# Altium PCB 数粒机发射板4通道.PcbDoc
Units mm, origin at the board's own origin, x right, y up, seen from the top; angles counter-clockwise.
Board outline 124 x 52 mm, 4 copper layers (TopLayer, MidLayer1, MidLayer2, BottomLayer); 17 components, 66 nets, 56 pads, 0 vias.
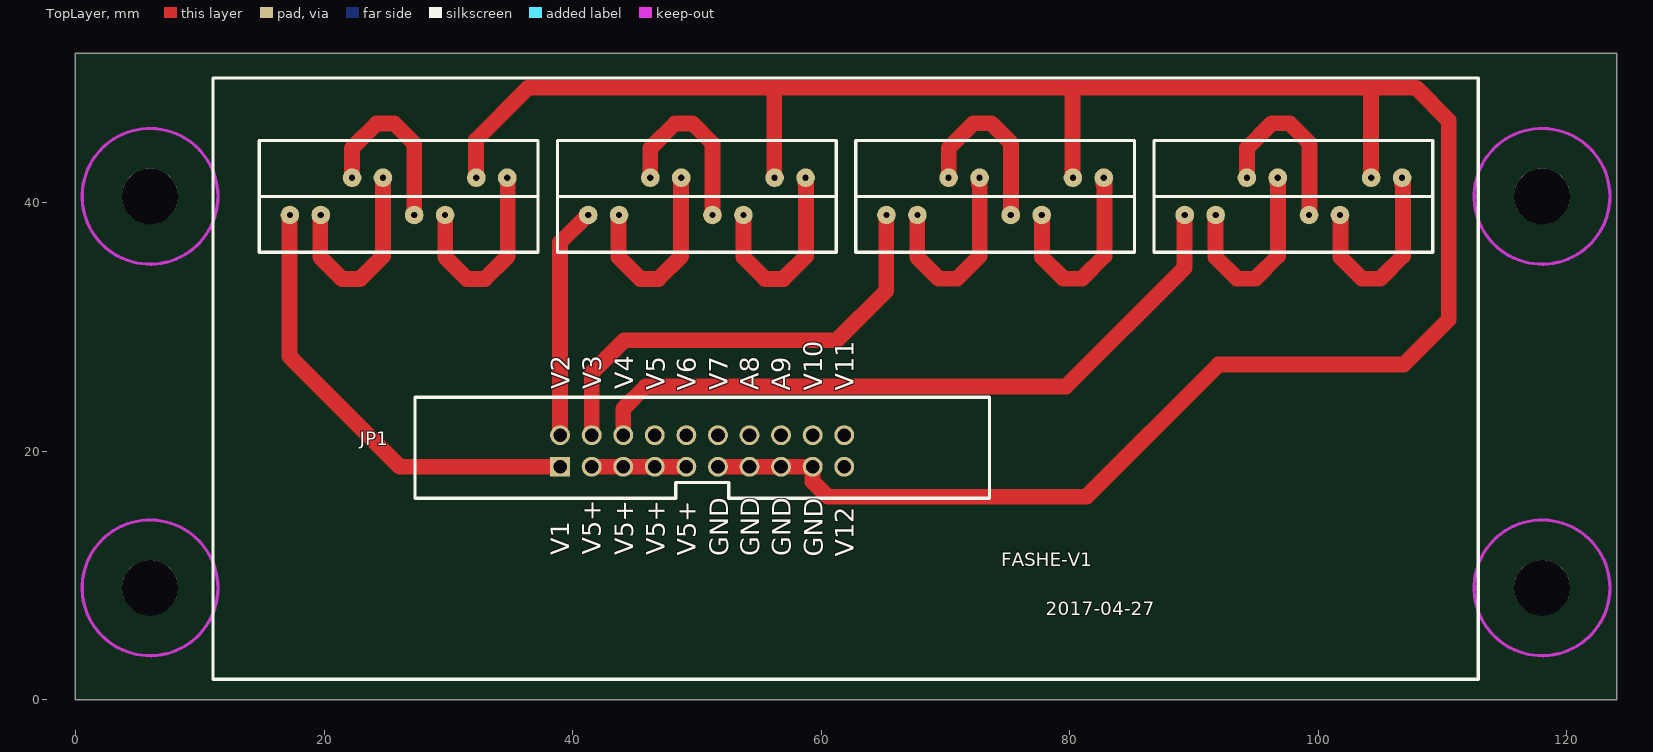
[diagram p0: TopLayer view]
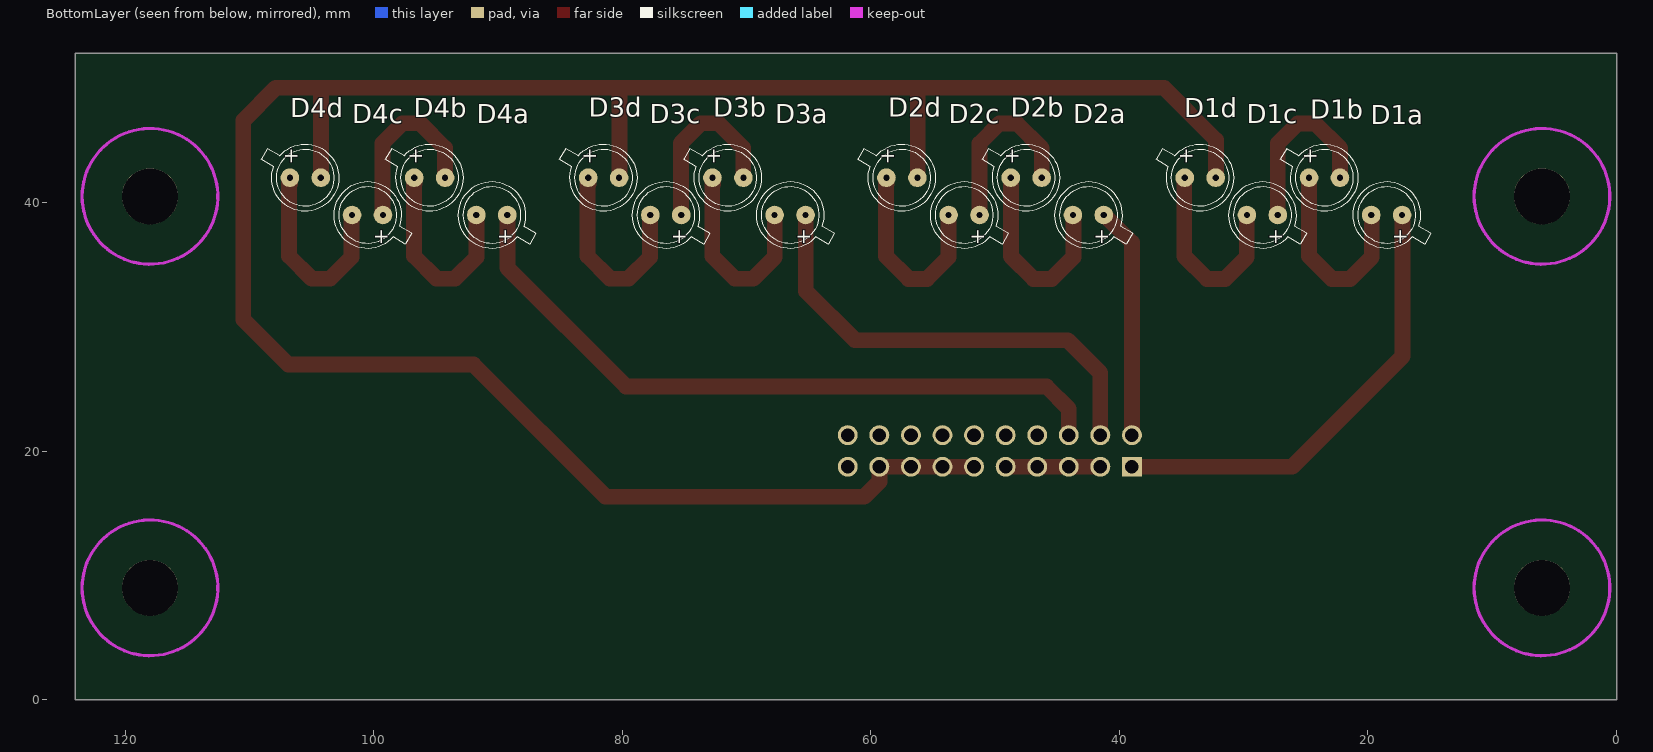
[diagram p1: BottomLayer view, seen from below]

## Layer stack, top to bottom
TopLayer: signal copper 0.0356
Dielectric: core 0.32, FR-4, Dk 4.8
MidLayer1: signal copper 0.0356
Dielectric: dielectric 0.32, FR-4, Dk 4.8
MidLayer2: signal copper 0.0356
Dielectric: dielectric 0.32, FR-4, Dk 4.8
BottomLayer: signal copper 0.0356

## Board outline
0,0 0,52 124,52 124,0

## Design rules (kind name [scope] priority, off if disabled: settings)
Clearance [All] p1: gap=0.762
PolygonConnect [All] p1: connectstyle=Relief reliefconductorwidth=0.254 reliefentries=4 polygonreliefangle="90 Angle"
RoutingLayers [All] p1: top layer_v5=TRUE mid layer 1_v5=FALSE mid layer 2_v5=FALSE bottom layer_v5=TRUE
RoutingVias RoutingVias_1 [All] p1: holewidth=1 width=2 viastyle="Through Hole" minholewidth=0.711 minwidth=1.27 maxholewidth=1 maxwidth=2
SilkscreenOverComponentPads [All] p1: minsilkscreentomaskgap=0.254
SolderMaskExpansion [All] p1: expansion=0.102
TestPointUsage [All] p1: valid=0 allowmultiple=FALSE
Testpoint [All] p1: side=15 testpointundercomponent=TRUE minsize=1.016 maxsize=2.54 preferedsize=1.524 minholesize=0.508 maxholesize=1.016 preferedholesize=0.813 testpointgrid=0.025 style=1023 order=0123456789
Width [All] p1: maxlimit=4.54 minlimit=0.2 preferedwidth=1
22 further rules are at their usual default settings.

## Components (designator, comment, footprint, x,y, rotation, side; value= is the part's Value field where it differs from the comment)
D1a "红外发射珠子" SEND-LED 18.5,39 r270 bottom
D1b "红外发射珠子" SEND-LED 23.5,42 r90 bottom
D1c "红外发射珠子" SEND-LED 28.5,39 r270 bottom
D1d "红外发射珠子" SEND-LED 33.5,42 r90 bottom
D2a "红外发射珠子" SEND-LED 42.5,39 r270 bottom
D2b "红外发射珠子" SEND-LED 47.5,42 r90 bottom
D2c "红外发射珠子" SEND-LED 52.5,39 r270 bottom
D2d "红外发射珠子" SEND-LED 57.5,42 r90 bottom
D3a "红外发射珠子" SEND-LED 66.5,39 r270 bottom
D3b "红外发射珠子" SEND-LED 71.5,42 r90 bottom
D3c "红外发射珠子" SEND-LED 76.5,39 r270 bottom
D3d "红外发射珠子" SEND-LED 81.5,42 r90 bottom
D4a "红外发射珠子" SEND-LED 90.5,39 r270 bottom
D4b "红外发射珠子" SEND-LED 95.5,42 r90 bottom
D4c "红外发射珠子" SEND-LED 100.5,39 r270 bottom
D4d "红外发射珠子" SEND-LED 105.5,42 r90 bottom
JP1 "牛角插座" IDCL20 38.996,18.748 r0 top locked

## Footprints (in the part's own frame and the unit in brackets; to place one, negate y for a bottom-side part, rotate by r counter-clockwise, add the part's x,y. Pads: shape width x height; smd on the part's side, far side on the other; paste and mask are expansions set on the pad)
IDCL20 [mm]
  rect 1.6x1.6 hole 1.1: 1(0,0)
  round 1.6 hole 1.1: 2(0,2.54) 3(2.54,0) 4(2.54,2.54) 5(5.08,0) 6(5.08,2.54) 7(7.62,0) 8(7.62,2.54) 9(10.16,0) 10(10.16,2.54) 11(12.7,0) 12(12.7,2.54) 13(15.24,0) 14(15.24,2.54) 15(17.78,0) 16(17.78,2.54) 17(20.32,0) 18(20.32,2.54) 19(22.86,0) 20(22.86,2.54)
  silkscreen extent -11.68,-2.54 34.54,5.59
SEND-LED [mm]
  round 1.5 hole 0.5: 1(0,1.245) 2(0,-1.245)
  silkscreen extent -2.7,-2.69 2.7,3.55

## Free pads (board coordinates)
  round 4.5 hole 4.5 unplated: 1(6,40.5) 2(6,9) 5(118,40.5) 6(118,9)

## Nets (pads, with @x,y where several pads share a name; then routed paths per layer and width w, separated by ;. In a path a pad name is that pad's centre, name@x,y a point inside that pad or via, vN(x,y) a via of type N, cw(c..) or ccw(c..) an arc to the next point about the centre after c; other vN are vias at no path point)
A-PA4'_0: 
A-PA4_0: 
A-PA5_0: 
A-PA6_0: 
A-VOUT1_0: D1a.1 JP1.1 | length 36.8
  TopLayer w1.27: D1a.1 17.215,38.96 17.215,27.63 26.097,18.748 JP1.1
A-VOUT2_0: D2a.1 JP1.2 | length 18.6
  TopLayer w1.27: JP1.2 38.996,36.781 D2a.1@41.215,39
A-VOUT3_0: D3a.1 JP1.4 | length 37.6
  TopLayer w1.27: JP1.4 41.536,26.296 44.16,28.92 61.265,28.92 65.235,32.89 D3a.1@65.235,39.01
A-VOUT4_0: D4a.1 JP1.6 | length 56.2
  TopLayer w1.27: JP1.6 44.076,23.406 45.875,25.205 79.69,25.205 89.245,34.76 D4a.1@89.245,39.01
A-VOUT5_0: JP1.8
A-VOUT6_0: JP1.10
A-VOUT7_0: JP1.12
A-VOUT8_0: JP1.14
A-VOUT9_0: JP1.16
A-VOUT10_0: JP1.18
A-VOUT11_0: JP1.20
A-VOUT12_0: JP1.19
GND: D1d.2 D2d.2 D3d.2 D4d.2 JP1.11 JP1.13 JP1.15 JP1.17 | length 188
  TopLayer w1.27: D1d.2@32.225,42 32.225,45.04 36.415,49.23 107.87,49.23 110.505,46.595 110.505,30.595 106.88,26.97 91.98,26.97 81.342,16.332 60.533,16.332 59.316,17.549 JP1.17 JP1.15 JP1.13 JP1.11 ; D2d.2@56.225,42 56.225,49.185 ; D3d.2@80.235,42 80.235,49.025 ; D4d.2@104.235,42 104.235,49.21
NetD1a_2: D1a.2 D1b.1 | length 16.2
  TopLayer w1.27: D1a.2 19.705,38.96 19.705,35.595 21.44,33.86 22.91,33.86 24.735,35.685 24.745,35.695 D1b.1
NetD1b_2: D1b.2 D1c.1 | length 14.6
  TopLayer w1.27: D1b.2@22.245,42 22.245,44.375 24.235,46.365 25.66,46.365 27.265,44.76 27.255,44.75 D1c.1
NetD1c_2: D1c.2 D1d.1 | length 16.2
  TopLayer w1.27: D1c.2@29.755,39 29.755,35.595 31.49,33.86 32.96,33.86 34.785,35.685 34.785,41.96 D1d.1
NetD1d_2: 
NetD2a_2: D2a.2 D2b.1 | length 15.7
  TopLayer w1.27: D2a.2@43.705,39 43.705,35.595 45.44,33.86 46.91,33.86 48.735,35.685 48.735,41.49 D2b.1@48.725,41.49
NetD2b_2: D2b.2 D2c.1 | length 14.7
  TopLayer w1.27: D2b.2@46.245,42 46.245,44.375 48.235,46.365 49.66,46.365 51.265,44.76 51.265,39.01 51.265,39 D2c.1@51.215,39.01
NetD2c_2: D2c.2 D2d.1 | length 15.9
  TopLayer w1.27: D2c.2@53.705,39.01 53.755,39 53.755,35.595 55.49,33.86 56.96,33.86 58.785,35.685 58.785,41.49 58.785,41.54 D2d.1@58.715,41.49
NetD2d_2: 
NetD3a_2: D3a.2 D3b.1 | length 15.8
  TopLayer w1.27: D3a.2@67.725,39.01 67.725,35.605 69.46,33.87 70.93,33.87 72.755,35.695 72.755,41.49 72.755,41.55 D3b.1@72.695,41.49
NetD3b_2: D3b.2 D3c.1 | length 14.7
  TopLayer w1.27: D3b.2@70.265,42 70.265,44.385 72.255,46.375 73.68,46.375 75.285,44.77 75.285,39.01 D3c.1@75.265,39.01
NetD3c_2: D3c.2 D3d.1 | length 15.9
  TopLayer w1.27: D3c.2@77.755,39.01 77.775,39.01 77.775,35.605 79.51,33.87 80.98,33.87 82.805,35.695 82.805,41.49 82.805,41.55 D3d.1@82.725,41.49
NetD3d_2: 
NetD4a_2: D4a.2 D4b.1 | length 15.8
  TopLayer w1.27: D4a.2@91.735,39.01 91.735,35.605 93.47,33.87 94.94,33.87 96.765,35.695 96.765,41.53 96.765,41.55 D4b.1@96.725,41.53
NetD4b_2: D4b.2 D4c.1 | length 14.7
  TopLayer w1.27: D4b.2@94.275,42 94.275,44.385 96.265,46.375 97.69,46.375 99.295,44.77 99.295,39.01 D4c.1@99.235,39.01
NetD4c_2: D4c.2 D4d.1 | length 15.9
  TopLayer w1.27: D4c.2@101.725,39.01 101.785,39.01 101.785,35.605 103.52,33.87 104.99,33.87 106.815,35.695 106.815,41.53 106.815,41.55 D4d.1@106.725,41.53
NetD4d_2: 
NetD5a_2: 
NetD5b_2: 
NetD5c_2: 
NetD5d_2: 
NetD6a_2: 
NetD6b_2: 
NetD6c_2: 
NetD6d_2: 
NetD7a_2: 
NetD7b_2: 
NetD7c_2: 
NetD7d_2: 
NetD8a_2: 
NetD8b_2: 
NetD8c_2: 
NetD8d_2: 
NetD9a_2: 
NetD9b_2: 
NetD9c_2: 
NetD9d_2: 
NetD10a_2: 
NetD10b_2: 
NetD10c_2: 
NetD10d_2: 
NetD11a_2: 
NetD11b_2: 
NetD11c_2: 
NetD11d_2: 
NetD12a_2: 
NetD12b_2: 
NetD12c_2: 
NetD12d_2: 
V+5_0: JP1.3 JP1.5 JP1.7 JP1.9 | length 7.6
  TopLayer w1.27: JP1.3 JP1.5 JP1.7 JP1.9

## Polygon pours and split planes (outlines as drawn)
GND on TopLayer "TopLayer-GND 2" (hatched 90Degree grid 0.508 track 0.508, remove dead copper, pour order 1002): 146.503,19.688
GND on BottomLayer "BottomLayer-GND 2" (hatched 90Degree grid 0.508 track 0.508, remove dead copper, pour order 1006): 298.159,33.642
GND on BottomLayer "BottomLayer-GND 3" (hatched 90Degree grid 0.508 track 0.508, remove dead copper, pour order 1007): -0.941,17.773

## Keep-outs
KeepOutLayer:
  circle w0.254: c118,40.5 r5.461
  circle w0.254: c118,9 r5.461
  circle w0.254: c6,9 r5.461
  circle w0.254: c6,40.5 r5.461

## Silkscreen, mask and mechanical layers (free items; w line width, h text height)
TopOverlay:
  lines w0.254: 11.064,1.653 11.064,50.013 112.856,50.013 ; 11.072,1.644 112.865,1.644 112.865,50.004 ; 14.785,40.5 26,40.5 37.215,40.5 ; 27.312,16.208 48.329,16.208 48.299,16.238 48.299,17.478 52.569,17.478 52.569,16.208 73.54,16.208 ; 38.785,40.5 50,40.5 61.215,40.5 ; 47.632,24.336 53.22,24.336 ; 62.785,40.5 74,40.5 85.215,40.5 ; 86.785,40.5 98,40.5 109.215,40.5 ; 14.785,36 37.215,36 37.215,45 14.785,45 14.785,36 ; 38.785,36 38.785,45 61.215,45 61.215,36 38.785,36 ; 62.785,36 85.215,36 85.215,45 62.785,45 62.785,36 ; 86.785,36 109.215,36 109.215,45 86.785,45 86.785,36
  text "V2" at 39.774,24.963 h1.5 r90
  text "V3" at 42.309,24.963 h1.5 r90
  text "V4" at 44.894,24.963 h1.5 r90
  text "V5" at 47.424,24.908 h1.5 r90
  text "V7" at 52.489,24.908 h1.5 r90
  text "A8" at 54.989,24.908 h1.5 r90
  text "V6" at 49.899,24.878 h1.5 r90
  text "V10" at 60.109,24.878 h1.5 r90
  text "A9" at 57.519,24.853 h1.5 r90
  text "V11" at 62.639,24.853 h1.5 r90
  text "V5+" at 42.279,11.668 h1.5 r90
  text "V5+" at 47.424,11.638 h1.5 r90
  text "V1" at 39.719,11.613 h1.5 r90
  text "V5+" at 44.864,11.613 h1.5 r90
  text "V5+" at 49.929,11.583 h1.5 r90
  text "GND" at 52.514,11.553 h1.5 r90
  text "GND" at 55.019,11.553 h1.5 r90
  text "GND" at 57.549,11.528 h1.5 r90
  text "GND" at 60.134,11.498 h1.5 r90
  text "V12" at 62.639,11.498 h1.5 r90
  text "FASHE-V1" at 74.5,10.755 h1.1
  text "2017-04-27" at 78.075,6.785 h1.1
Mechanical1:
  the board outline again, w0.254

## Dimensions
14.785,45 to 38.785,45 on TopOverlay
118,40.5 to 118,9 on TopOverlay
6,40.5 to 118,40.5 on TopOverlay
0,52 to 0,0 on TopOverlay
124,0 to 0,0 on TopOverlay

## Text inside footprints (layer, text, board x,y; h text height)
D1a: BottomOverlay "+" at 17.89,37.94 h1.2 r90
D1b: BottomOverlay "+" at 24.11,43.06 h1.2 r270
D1c: BottomOverlay "+" at 27.89,37.94 h1.2 r90
D1d: BottomOverlay "+" at 34.11,43.06 h1.2 r270
D2a: BottomOverlay "+" at 41.89,37.94 h1.2 r90
D2b: BottomOverlay "+" at 48.11,43.06 h1.2 r270
D2c: BottomOverlay "+" at 51.89,37.94 h1.2 r90
D2d: BottomOverlay "+" at 58.11,43.06 h1.2 r270
D3a: BottomOverlay "+" at 65.89,37.94 h1.2 r90
D3b: BottomOverlay "+" at 72.11,43.06 h1.2 r270
D3c: BottomOverlay "+" at 75.89,37.94 h1.2 r90
D3d: BottomOverlay "+" at 82.11,43.06 h1.2 r270
D4a: BottomOverlay "+" at 89.89,37.94 h1.2 r90
D4b: BottomOverlay "+" at 96.11,43.06 h1.2 r270
D4c: BottomOverlay "+" at 99.89,37.94 h1.2 r90
D4d: BottomOverlay "+" at 106.11,43.06 h1.2 r270